# EAGLE board Main (EAGLE 6.6.0)
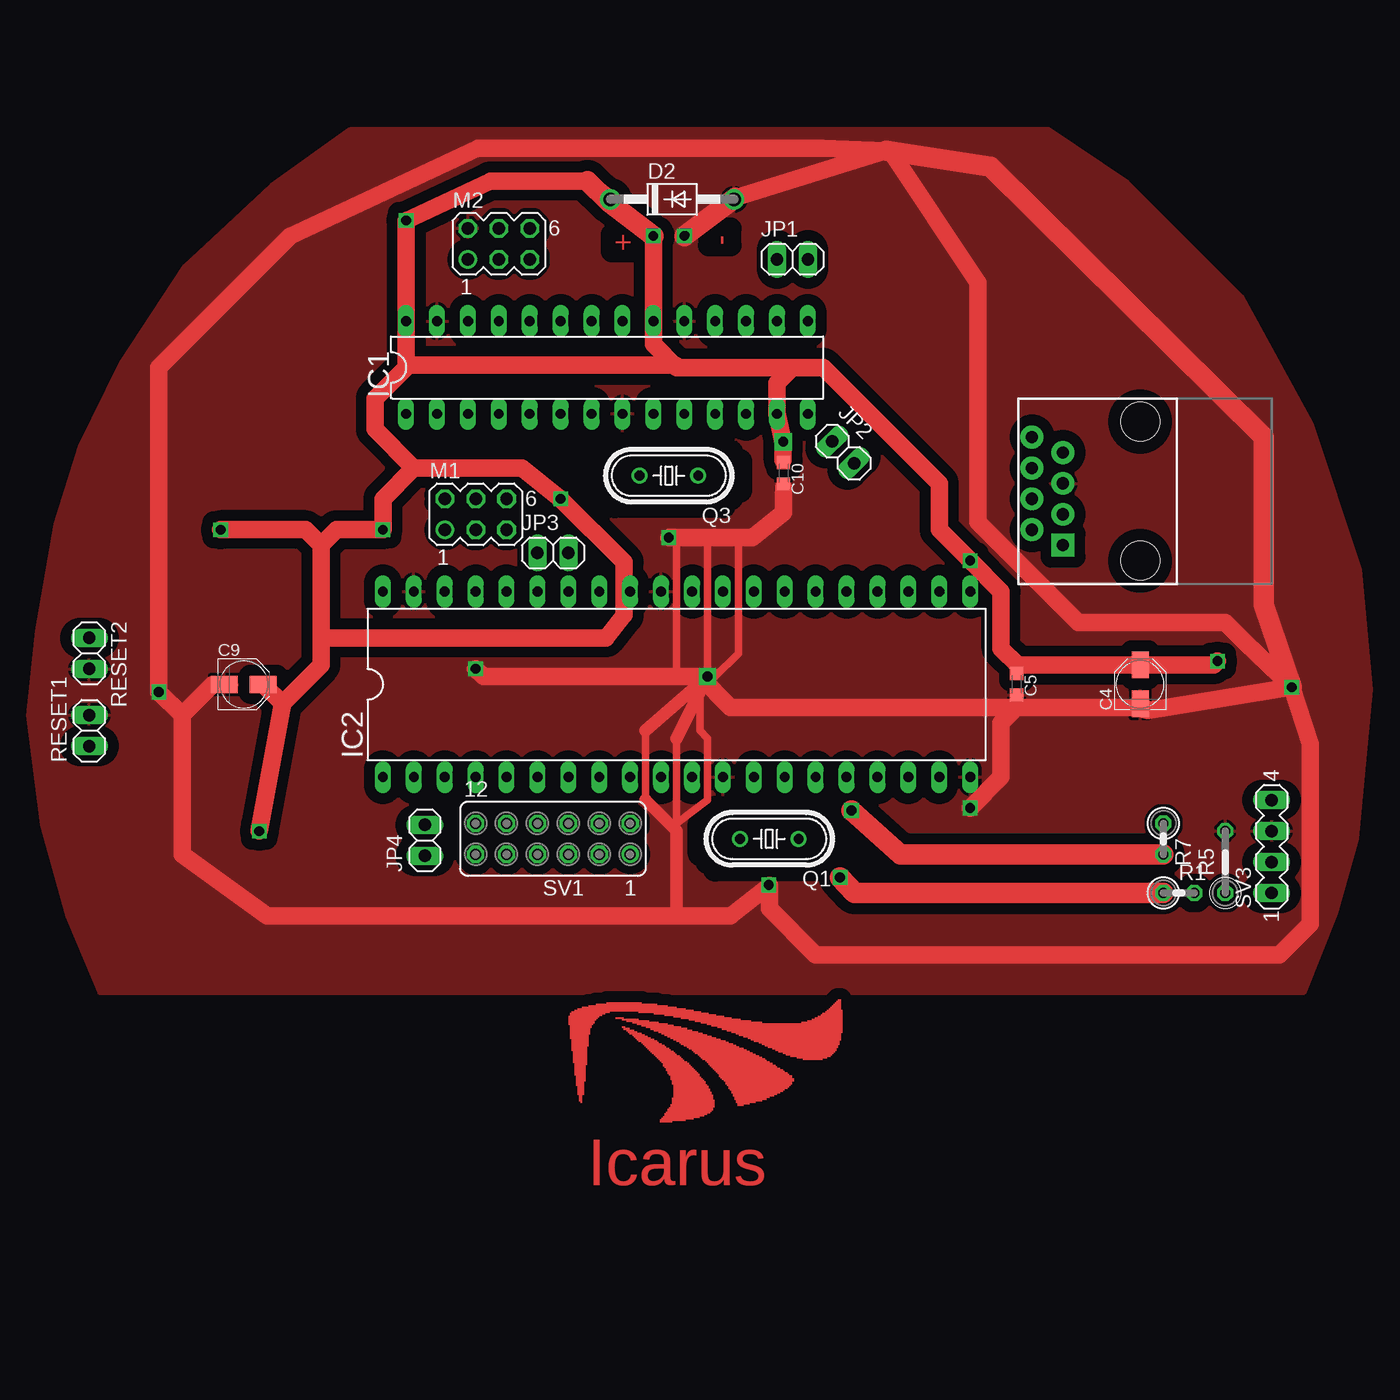
[diagram p0: board, top side]
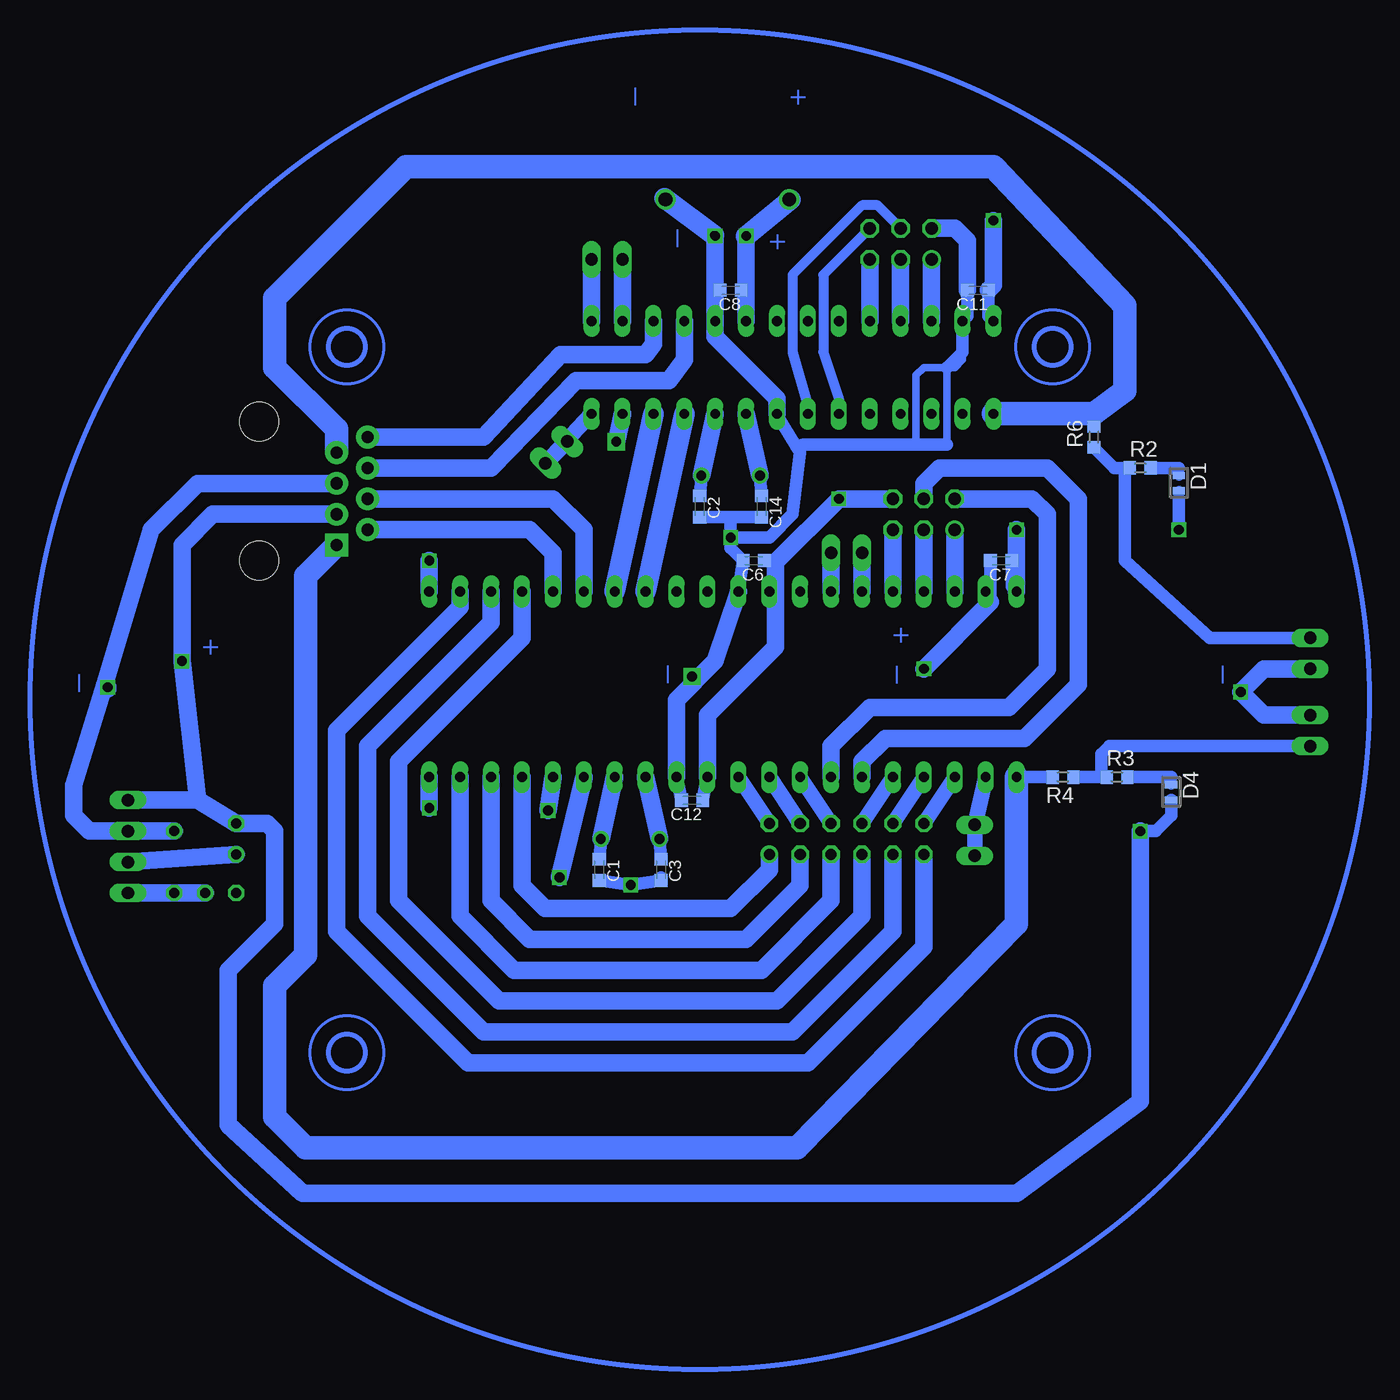
[diagram p1: board, bottom side, seen from below]

No outline drawn. Coordinates in mm, seen from the top.
Copper layers (1*16): Top 0.035mm / dielectric 1.5mm / Bottom 0.035mm
Design rules "default": minimum track width 10mil, minimum drill 24mil, track to track 8mil, track to pad 8mil, pad to pad 8mil, via to via 8mil, smd to smd 8mil, copper to edge 40mil, drill to drill 8mil, minimum pad ring 10mil, minimum via ring 8mil, stop-mask expansion 4mil, vias tented up to drill 0mil, thermal gap 10mil
tRestrict: area 63.8,-12.9 to 75.2,-7.9; area 55.5,17 to 67,22

## Footprints (pad centres in the part's own frame; a part is rotated, then mirrored left to right if it is on the bottom)
C0603K = smd 1.05 x 1.08: 1 -0.875,0; 2 0.875,0
PANASONIC_B = smd 2.2 x 1.4: + 1.6,0; - -1.6,0
SOD123 = smd 0.6 x 1: A 1.25,0; C 0,0
DO41-10 = drill 1.118: A 5.08,0; C -5.08,0
DIL28-3 = drill 0.813 long: 1 -16.51,-3.81; 2 -13.97,-3.81; 3 -11.43,-3.81; 4 -8.89,-3.81; 5 -6.35,-3.81; 6 -3.81,-3.81; 7 -1.27,-3.81; 8 1.27,-3.81; 9 3.81,-3.81; 10 6.35,-3.81; 11 8.89,-3.81; 12 11.43,-3.81; 13 13.97,-3.81; 14 16.51,-3.81; 15 16.51,3.81; 16 13.97,3.81; 17 11.43,3.81; 18 8.89,3.81; 19 6.35,3.81; 20 3.81,3.81; 21 1.27,3.81; 22 -1.27,3.81; 23 -3.81,3.81; 24 -6.35,3.81; 25 -8.89,3.81; 26 -11.43,3.81; 27 -13.97,3.81; 28 -16.51,3.81
DIL40 = drill 0.813 long: 1 -24.13,-7.62; 2 -21.59,-7.62; 3 -19.05,-7.62; 4 -16.51,-7.62; 5 -13.97,-7.62; 6 -11.43,-7.62; 7 -8.89,-7.62; 8 -6.35,-7.62; 9 -3.81,-7.62; 10 -1.27,-7.62; 11 1.27,-7.62; 12 3.81,-7.62; 13 6.35,-7.62; 14 8.89,-7.62; 15 11.43,-7.62; 16 13.97,-7.62; 17 16.51,-7.62; 18 19.05,-7.62; 19 21.59,-7.62; 20 24.13,-7.62; 21 24.13,7.62; 22 21.59,7.62; 23 19.05,7.62; 24 16.51,7.62; 25 13.97,7.62; 26 11.43,7.62; 27 8.89,7.62; 28 6.35,7.62; 29 3.81,7.62; 30 1.27,7.62; 31 -1.27,7.62; 32 -3.81,7.62; 33 -6.35,7.62; 34 -8.89,7.62; 35 -11.43,7.62; 36 -13.97,7.62; 37 -16.51,7.62; 38 -19.05,7.62; 39 -21.59,7.62; 40 -24.13,7.62
1X02 = drill 1.016 long: 1 -1.27,0; 2 1.27,0
RJ45-8 = drill 1 pad 1.88 square: 1 -4.445,6.35 | drill 1 pad 1.88: 2 -3.175,8.89; 3 -1.905,6.35; 4 -0.635,8.89; 5 0.635,6.35; 6 1.905,8.89; 7 3.175,6.35; 8 4.445,8.89 | hole 3.2: -5.715,0; 5.715,0
MA03-2 = drill 1.016: 1 -2.54,-1.27 | drill 1.016 octagon: 2 -2.54,1.27; 3 0,-1.27; 4 0,1.27; 5 2.54,-1.27; 6 2.54,1.27
HC49/S = drill 0.813: 1 -2.413,0; 2 2.413,0
0207/2V = drill 0.813 octagon: 1 -1.27,0; 2 1.27,0
R0603 = smd 1 x 1.1: 1 -0.85,0; 2 0.85,0
0207/5V = drill 0.813 octagon: 1 -2.54,0; 2 2.54,0
FE06-2 = drill 0.914: 1 -6.35,1.27 | drill 0.914 octagon: 2 -6.35,-1.27; 3 -3.81,1.27; 4 -3.81,-1.27; 5 -1.27,1.27; 6 -1.27,-1.27; 7 1.27,1.27; 8 1.27,-1.27; 9 3.81,1.27; 10 3.81,-1.27; 11 6.35,1.27; 12 6.35,-1.27
MA04-1 = drill 1.016 long: 1 -3.81,0; 2 -1.27,0; 3 1.27,0; 4 3.81,0

## Placement (x,y rotation side)
C1  [C0603K]  71.97,-12.93 270 bottom
C2  [C0603K]  63.72,16.92 270 bottom
C3  [C0603K]  66.89,-12.93 270 bottom
C4  [PANASONIC_B]  99.91,2.31 90 top
C5  [C0603K]  89.75,2.31 270 top
C6  [C0603K]  59.27,12.47 180 bottom
C7  [C0603K]  38.95,12.47 180 bottom
C8  [C0603K]  61.17,34.7 180 bottom
C9  [PANASONIC_B]  26.25,2.31 0 top
C10  [C0603K]  70.61,19.66 270 top
C11  [C0603K]  40.85,34.7 180 bottom
C12  [C0603K]  64.35,-7.21 180 bottom
C14  [C0603K]  58.63,16.92 270 bottom
D1  [SOD123]  24.34,19.46 270 bottom
D2  1N4004  [DO41-10]  61.45,42.17 0 top
D4  [SOD123]  24.98,-5.94 270 bottom
IC1  DSPIC30F4012/SP  [DIL28-3]  56.09,28.35 0 top
IC2  DSPIC30F4011/P  [DIL40]  61.81,2.31 0 top
JP1  [1X02]  71.33,37.24 0 top
JP2  [1X02]  75.5,21.38 315 top
JP3  [1X02]  51.65,13.11 0 top
JP4  [1X02]  41.12,-10.5 90 top
JP6  RJ45  [RJ45-8]  99.91,18.19 90 top
M1  [MA03-2]  45.3,16.29 0 top
M2  [MA03-2]  47.2,38.51 0 top
Q1  [HC49/S]  69.43,-10.38 180 top
Q3  [HC49/S]  61.17,19.46 180 top
R1  [0207/2V]  103.08,-14.83 0 top
R2  100k  [R0603]  27.52,20.09 0 bottom
R3  100k  [R0603]  29.43,-5.3 0 bottom
R4  100  [R0603]  33.87,-5.3 180 bottom
R5  [0207/5V]  106.89,-12.29 90 top
R6  100  [R0603]  31.33,22.64 90 bottom
R7  10k  [0207/2V]  101.81,-10.38 270 top
RESET1  [1X02]  13.55,-1.5 90 top
RESET2  [1X02]  13.55,4.86 270 top
SV1  [FE06-2]  51.65,-10.38 180 top
SV3  [MA04-1]  110.7,-11.02 90 top

## Library data of the parts
C1-C12 C14 R2-R4 R6 = adafruit
D1 D4 = GFL_Micromouse
D2 = diode
IC1 IC2 = microchip-dspic
JP1-JP4 RESET1 RESET2 = pinhead
JP6 = SparkFun-Connectors; PROD_ID: CONN-08506
M1 M2 SV3 = con-lstb; OC_FARNELL: unknown; OC_NEWARK: unknown
Q1 Q3 = adafruit; OC_FARNELL: 1667008; OC_NEWARK: unknown
R1 R5 R7 = resistor
SV1 = con-lsta; OC_FARNELL: unknown; OC_NEWARK: unknown

## Nets
+5V: C4.+ C5.1 C6.1 C7.1 C8.1 C9.+ C10.1 C11.1 C12.1 D1.A D2.C D4.A IC1.13 IC1.20 IC1.28 IC2.11 IC2.21 IC2.32 IC2.40 JP6.3 M1.6 R7.1 SV3.4
COM1: IC1.11 IC2.28
COM2: IC1.12 IC2.27
DIR1A: IC2.37 M1.3
DIR1B: IC2.36 M1.5
DIR2A: IC1.25 M2.3
DIR2B: IC1.24 M2.5
ENC1A: IC2.6 M1.4
ENC1B: IC2.7 M1.2
ENC2A: IC1.6 M2.6
ENC2B: IC1.7 M2.4
GND: C1.2 C2.2 C3.2 C4.- C5.2 C6.2 C7.2 C8.2 C9.- C10.2 C11.2 C12.2 C14.2 D2.A IC1.8 IC1.19 IC1.27 IC2.12 IC2.20 IC2.31 IC2.39 JP6.5 M2.2 R5.2 RESET1.2 RESET2.2 SV3.3
I1: IC2.17 SV1.1
I2: IC2.18 SV1.3
I3: IC2.19 SV1.5
I4: IC2.24 SV1.7
I5: IC2.23 SV1.9
I6: IC2.22 SV1.11
LED3: IC1.15 JP1.2
LED4: IC1.16 JP1.1
MCLR1: IC2.1 JP6.1 R4.2
MCLR2: IC1.1 JP6.7 R6.2
N$1: C1.1 IC2.14 Q1.1
N$2: C3.1 IC2.13 Q1.2
N$3: C2.1 IC1.10 Q3.1
N$4: D4.C R3.2
N$5: IC2.35 JP3.1
N$6: C14.1 IC1.9 Q3.2
N$7: IC2.15 R1.1
N$8: IC2.34 JP3.2
N$9: R1.2 R5.1 SV3.1
N$10: R2.1 R6.1 RESET2.1
N$11: IC2.16 R7.2 SV3.2
N$12: R3.1 R4.1 RESET1.1
N$13: IC2.2 JP4.1 JP4.2
N$14: IC1.14 JP2.1 JP2.2
N$16: D1.C R2.2
O1: IC2.3 SV1.12
O2: IC2.4 SV1.10
O3: IC2.5 SV1.8
O4: IC2.8 SV1.6
O5: IC2.9 SV1.4
O6: IC2.10 SV1.2
PGC1: IC2.26 JP6.4
PGC2: IC1.18 JP6.6
PGD1: IC2.25 JP6.2
PGD2: IC1.17 JP6.8
PWM1: IC2.38 M1.1
PWM2: IC1.26 M2.1

## Tracks (layer width: path | path; a pad name or v marks a point on that pad's centre or on a via)
+5V  (via drill 0.8, 0.8 pad 0.81, 0.8 pad 1.42)
  Top 0.61: C5.1 89.84,3.28 89.84,3.92 | C10.1 70.56,20.73 | IC2.32 57.56,9.94 57.5,9.88
  Top 1.422: v106.26,4.22 105.95,3.92 C4.+ 89.84,3.92 88.48,5.28 88.48,9.94 v85.94,12.47 83.4,15.02 83.4,18.82 73.88,28.35 71.33,28.35 | C9.+ 29.43,0.74 | 29.43,0.74 v27.52,-9.75 | 29.43,0.74 32.6,3.92 32.6,13.74 | 32.6,13.74 33.87,15.02 v37.68,15.02 37.68,17.55 40.22,20.09 | 32.6,13.74 31.33,15.02 v24.34,15.02 | 71.33,28.35 70.06,27.08 IC1.13 v70.56,22.25 70.56,20.73 | 71.33,28.35 61.81,28.35 59.91,30.25 IC1.20 v59.91,39.16 | 40.22,20.09 49.11,20.09 v52.28,17.55 57.5,12.34 57.5,9.88 57.5,8 56,6.12 32.88,6.12 | 39.59,28.55 v39.59,40.42 46.52,43.67 54.48,43.67 D2.C | 39.59,28.55 39.59,28.35 37.05,25.81 37.05,23.27 40.22,20.09 | 39.59,28.55 61.7,28.55 61.88,28.38
  Top 1.676: v59.91,39.16 56.28,41.94 54.48,43.67
  Bottom 0.61: 58,12.47 57.63,12.47 57.5,12.34
  Bottom 0.813: 24.34,17.55 D1.A | C8.1 59.91,34.7 | C7.1 37.68,12.47
  Bottom 1.016: IC2.11 C12.1 | IC1.28 39.98,32.55 C11.1 | IC2.40 38.08,10.33 C7.1 | v24.34,15.02 24.34,17.55 | C6.1 58,12.47 | v27.52,-9.75 26.25,-9.75 24.98,-8.48 D4.A
  Bottom 1.422: 104.99,-7.21 R7.1 99.28,-9.12 98.64,-9.75 98.64,-17.37 102.45,-21.18 102.45,-33.88 96.33,-39.5 37.67,-39.5 27.52,-31.98 v27.52,-9.75 | 104.99,-7.21 SV3.4 | JP6.3 103.72,16.29 106.26,13.74 v106.26,4.22 104.99,-7.21 | v85.94,12.47 IC2.21 | 37.68,12.47 v37.68,15.02 IC2.40 | v59.91,39.16 59.91,34.7 IC1.20 | M1.6 v52.28,17.55 57.5,12.34 57.5,5.38 63.08,-0.2 IC2.11 | v39.59,40.42 39.59,35.09 C11.1 | v70.56,22.25 IC1.13
  Bottom 1.676: v59.91,39.16 56.25,42.12
COM1
  Bottom 1.676: IC2.28 IC1.11
COM2
  Bottom 1.676: IC1.12 IC2.27
DIR1A
  Bottom 1.422: IC2.37 M1.3
DIR1B
  Bottom 1.422: IC2.36 M1.5
DIR2A
  Bottom 1.422: IC1.25 M2.3
DIR2B
  Bottom 1.422: M2.5 IC1.24
ENC1A
  Bottom 1.422: M1.4 45.3,18.82 44.03,20.09 35.14,20.09 32.6,17.55 32.6,2.31 37.05,-2.13 48.48,-2.13 50.38,-4.04 IC2.6
ENC1B
  Bottom 1.422: M1.2 36.41,17.55 35.14,16.29 35.14,3.58 38.31,0.41 49.74,0.41 52.92,-2.77 IC2.7
ENC2A
  Bottom 0.813: M2.6 53.55,35.97 53.55,29.62 52.28,25.81 IC1.6
ENC2B
  Bottom 0.813: M2.4 49.11,41.69 50.38,41.69 56.09,35.97 56.09,29.62 54.83,25.18 IC1.7
GND  (via drill 0.6, 0.8, 0.8 pad 0.81, 0.8 pad 1.42)
  Top 0.61: 61.81,-2.13 61.81,-9.12 | 61.81,-9.12 61.81,-9.75 | 59.27,-7.21 59.27,-1.5 | C5.2 89.75,0.41 | 64.35,14.38 v64.35,2.95 64.98,2.95 66.89,4.86 66.89,13.74 66.25,14.38 | 62.45,14.38 61.81,13.74 61.81,2.95 | 61.81,-9.12 64.35,-7.21 64.35,-2.13 63.72,-1.5 63.72,2.95 | 70.61,18.48 C10.2
  Top 1.016: v69.39,-14.18 69.14,-14.2 69.43,-14.2 | 61.81,-2.13 v64.35,2.95 59.27,-1.5 | 59.27,-7.21 61.81,-9.75 61.81,-16.73
  Top 1.422: v85.94,-7.84 88.48,-5.3 88.48,-0.86 89.75,0.41 | 100.55,0.17 v112.37,2.08 | C4.- 100.55,0.17 | 21.17,-0.23 21.17,-11.65 28.16,-16.73 61.81,-16.73 66.25,-16.73 69.43,-14.2 69.43,-16.1 73.24,-19.91 111.34,-19.91 113.88,-17.37 113.88,-2.61 v112.37,2.08 | 21.17,-0.23 23.71,2.31 C9.- | 21.17,-0.23 v19.27,1.68 19.27,28.35 30.06,39.15 45.49,46.35 73.74,46.35 79.05,46.17 | v112.37,2.08 108.56,5.73 106.89,7.39 94.83,7.39 86.58,15.65 86.58,35.34 79.3,46.23 79.05,46.17 | 79.05,46.17 66.66,42.3 D2.A | v61.17,14.38 62.45,14.38 64.35,14.38 66.25,14.38 68.06,14.38 70.61,16.42 70.61,18.48 | 100.55,0.17 99.52,0.41 89.75,0.41 | v45.3,3.58 45.94,2.95 61.81,2.95 63.72,2.95 | 63.72,2.95 v64.35,2.95 | 89.75,0.41 66.25,0.41 63.72,2.95
  Top 1.676: 66.66,42.3 v62.56,39.24 v62.45,39.16 | v112.37,2.08 110.07,8.82 110.07,22.64 87.59,44.86 79.05,46.17
  Bottom 0.61: 43.4,28.35 43.4,22 | 45.94,22 45.94,27.71 45.3,28.35 42.76,28.35 42.12,28.98 42.12,29.62
  Bottom 0.813: C8.2 62.45,34.7
  Bottom 1.016: IC2.12 C12.2 | IC2.31 C6.2 61.17,13.51 v61.17,14.38 | C14.2 61.17,16.05 | 61.17,16.05 C2.2 | v61.17,14.38 61.17,16.05 | IC1.8 57.37,23.91 57.43,24.5 55.81,21.89 | 55.81,21.89 55.46,21.36 56.09,16.29 58,14.38 v61.17,14.38 | C11.2 41.73,32.55 IC1.27 42.12,29.62 43.4,28.35 | IC2.39 39.83,10.33 C7.2 39.83,9.06 | C1.2 v69.39,-14.18 C3.2 66.89,-13.56 | 43.4,22 45.94,22 55.21,22 55.81,21.89
  Bottom 1.422: 112.61,2.31 115.15,-5.94 115.15,-8.48 113.88,-9.75 SV3.3 R5.2 | JP6.5 104.99,18.82 108.8,15.02 112.61,2.31 | v85.94,-7.84 IC2.20 | v112.37,2.08 112.37,1.92 112.61,2.31 | RESET1.2 17.36,-0.23 v19.27,1.68 17.36,3.58 RESET2.2 | v62.45,39.16 62.45,34.7 IC1.19 62.45,30.89 57.37,25.81 IC1.8 | C11.2 41.73,38.75 42.76,39.78 M2.2 | 39.83,9.06 v45.3,3.58 | IC2.12 65.62,1.04 62.45,4.22 IC2.31
  Bottom 1.676: v62.56,39.24 66.62,42.25
  pour Top (isolate 0.9): 113.38,-23.12 14.38,-23.12 14.38,-23 11.75,-16.75 9.62,-9.25 8.5,-0.25 9.25,6.75 10.75,15.5 12.75,21.88 16.12,28.75 21.38,36.75 28.5,43.38 35,48 92.38,48 98.88,43.62 108.25,34.25 114,23.75 118,11.75 118.88,1.88 117.75,-10.38 116,-16.5
I1
  Bottom 1.422: IC2.17 78.32,-14.2 76.42,-16.1 61.17,-16.1 58,-12.93 SV1.1
I2
  Bottom 1.422: IC2.18 80.86,-15.46 77.69,-18.64 59.91,-18.64 55.46,-14.2 SV1.3
I3
  Bottom 1.422: IC2.19 83.4,-16.73 78.95,-21.18 58.63,-21.18 52.92,-15.46 SV1.5
I4
  Bottom 1.422: IC2.24 78.32,6.12 88.48,-4.04 88.48,-15.46 80.22,-23.72 57.37,-23.72 50.38,-16.73 SV1.7
I5
  Bottom 1.422: IC2.23 80.86,7.39 91.02,-2.77 91.02,-16.73 81.5,-26.26 56.09,-26.26 47.84,-18 SV1.9
I6
  Bottom 1.422: IC2.22 83.4,8.66 93.56,-1.5 93.56,-18 82.77,-28.8 54.83,-28.8 45.3,-19.27 SV1.11
LED3
  Bottom 1.422: IC1.15 JP1.2
LED4
  Bottom 1.422: IC1.16 JP1.1
MCLR1
  Bottom 1.016: IC2.1 R4.2
  Bottom 1.93: JP6.1 96.1,11.21 96.1,-19.91 98.64,-22.45 98.64,-33.24 96.1,-35.78 55.72,-35.78 37.68,-17.37 IC2.1
MCLR2
  Bottom 1.016: R6.2 31.33,24.54
  Bottom 1.93: JP6.7 93.56,23.27 98.64,28.35 98.64,34.06 87.84,44.86 39.59,44.86 28.79,33.43 28.79,26.45 31.33,24.54 IC1.1
N$1
  Bottom 1.016: Q1.1 C1.1
  Bottom 1.422: IC2.14 Q1.1
N$2
  Bottom 1.016: C3.1 Q1.2 C3.1
  Bottom 1.422: Q1.2 IC2.13
N$3
  Bottom 1.016: Q3.1 C2.1
  Bottom 1.422: IC1.10 Q3.1
N$4
  Bottom 0.813: D4.C 24.98,-5.3
  Bottom 1.016: R3.2 24.98,-5.3
N$5
  Bottom 1.422: IC2.35 JP3.1
N$6
  Bottom 1.016: C14.1 Q3.2
  Bottom 1.422: Q3.2 IC1.9
N$7  (via drill 0.8)
  Top 1.676: v75.25,-13.56 76.42,-14.83 R1.1
  Bottom 1.422: IC2.15 v75.25,-13.56
N$8
  Bottom 1.422: JP3.2 IC2.34
N$9
  Bottom 1.422: SV3.1 R5.1 R1.2
N$10
  Bottom 1.016: R6.1 29.64,20.09 R2.1 28.79,19.68 28.79,12.47 21.8,6.12 RESET2.1
N$11  (via drill 0.8)
  Top 1.676: v76.18,-8.04 80.22,-11.65 R7.2
  Bottom 1.422: IC2.16 v76.18,-8.04 | SV3.2 R7.2
N$12
  Bottom 1.016: R4.1 30.7,-5.3 | RESET1.1 30.06,-2.77 30.7,-3.4 30.7,-5.3 | 30.7,-5.3 R3.1
N$13
  Bottom 1.27: JP4.1 JP4.2 IC2.2
N$14
  Bottom 1.27: IC1.14 JP2.2 JP2.1
N$16
  Bottom 0.813: 24.34,20.09 D1.C
  Bottom 1.016: R2.2 24.34,20.09
O1
  Bottom 1.27: SV1.12 IC2.3
O2
  Bottom 1.27: SV1.10 IC2.4
O3
  Bottom 1.27: SV1.8 IC2.5
O4
  Bottom 1.27: SV1.6 IC2.8
O5
  Bottom 1.27: SV1.4 IC2.9
O6
  Bottom 1.27: SV1.2 IC2.10
PGC1
  Bottom 1.422: IC2.26 73.24,15.02 75.78,17.55 JP6.4
PGC2
  Bottom 1.422: JP6.6 80.86,20.09 73.88,27.28 66.25,27.28 64.98,28.98 IC1.18
PGD1
  Bottom 1.422: IC2.25 75.78,13.11 77.69,15.02 JP6.2
PGD2
  Bottom 1.422: IC1.17 67.53,30.25 68.16,29.42 75.14,29.42 81.5,22.64 JP6.8
PWM1
  Bottom 1.422: IC2.38 M1.1
PWM2
  Bottom 1.422: M2.1 IC1.26
(copper drawn outside any net)
  shapes: Bottom circle x9, Top area x235

## Text on the board
Top: + | - | Icarus | Icarus
Bottom: + | _ | + | _ | + | + | _ | _ | _ | _